# EAGLE board 00A-004-A (EAGLE 6.3)
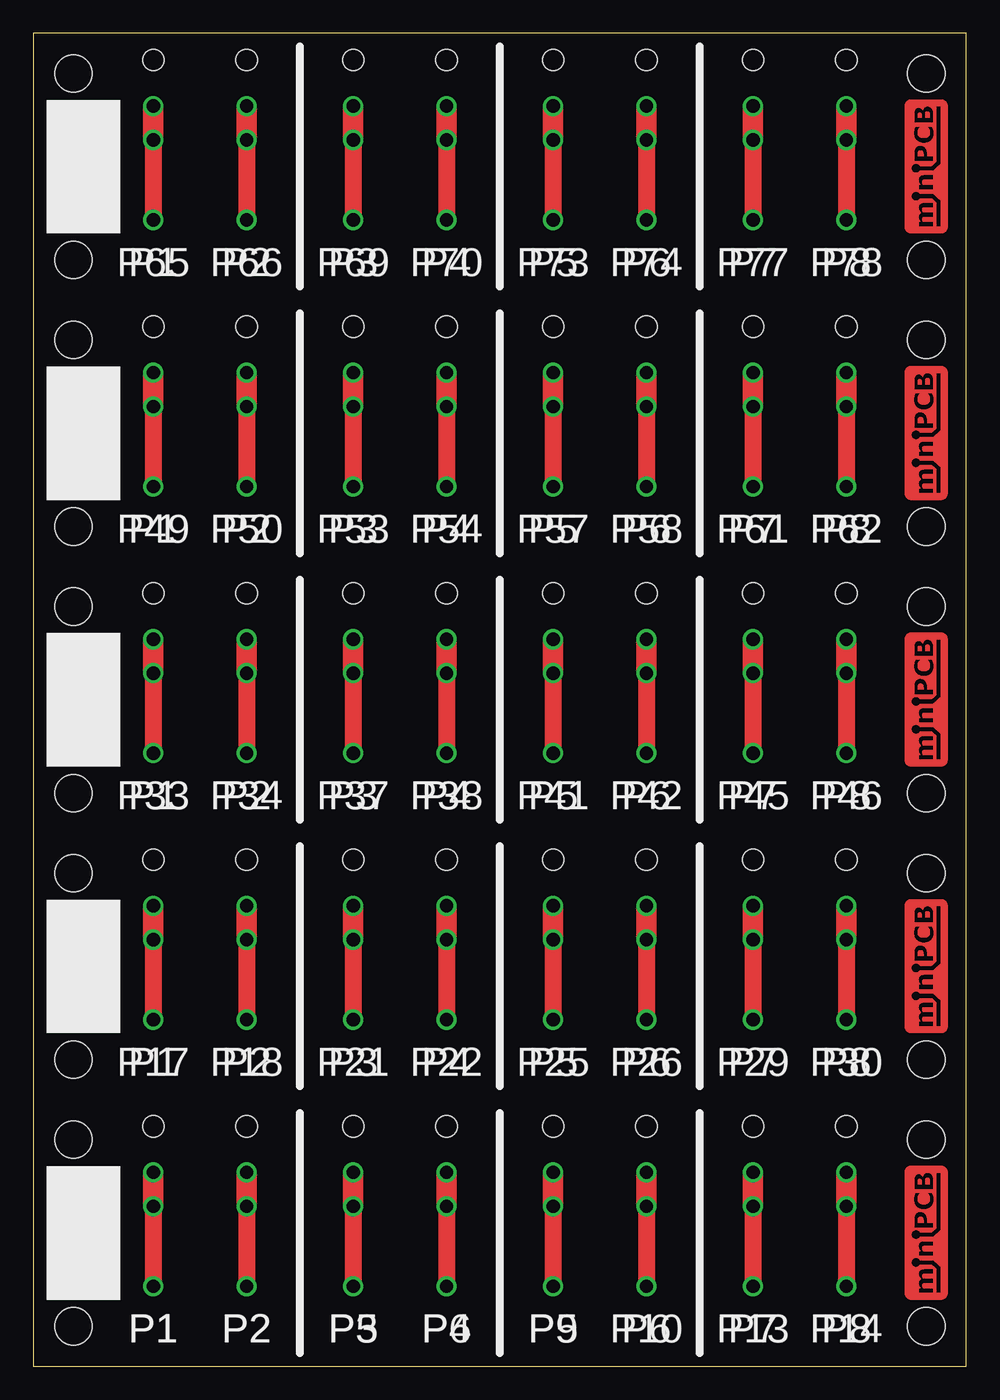
[diagram p0: board, top side]
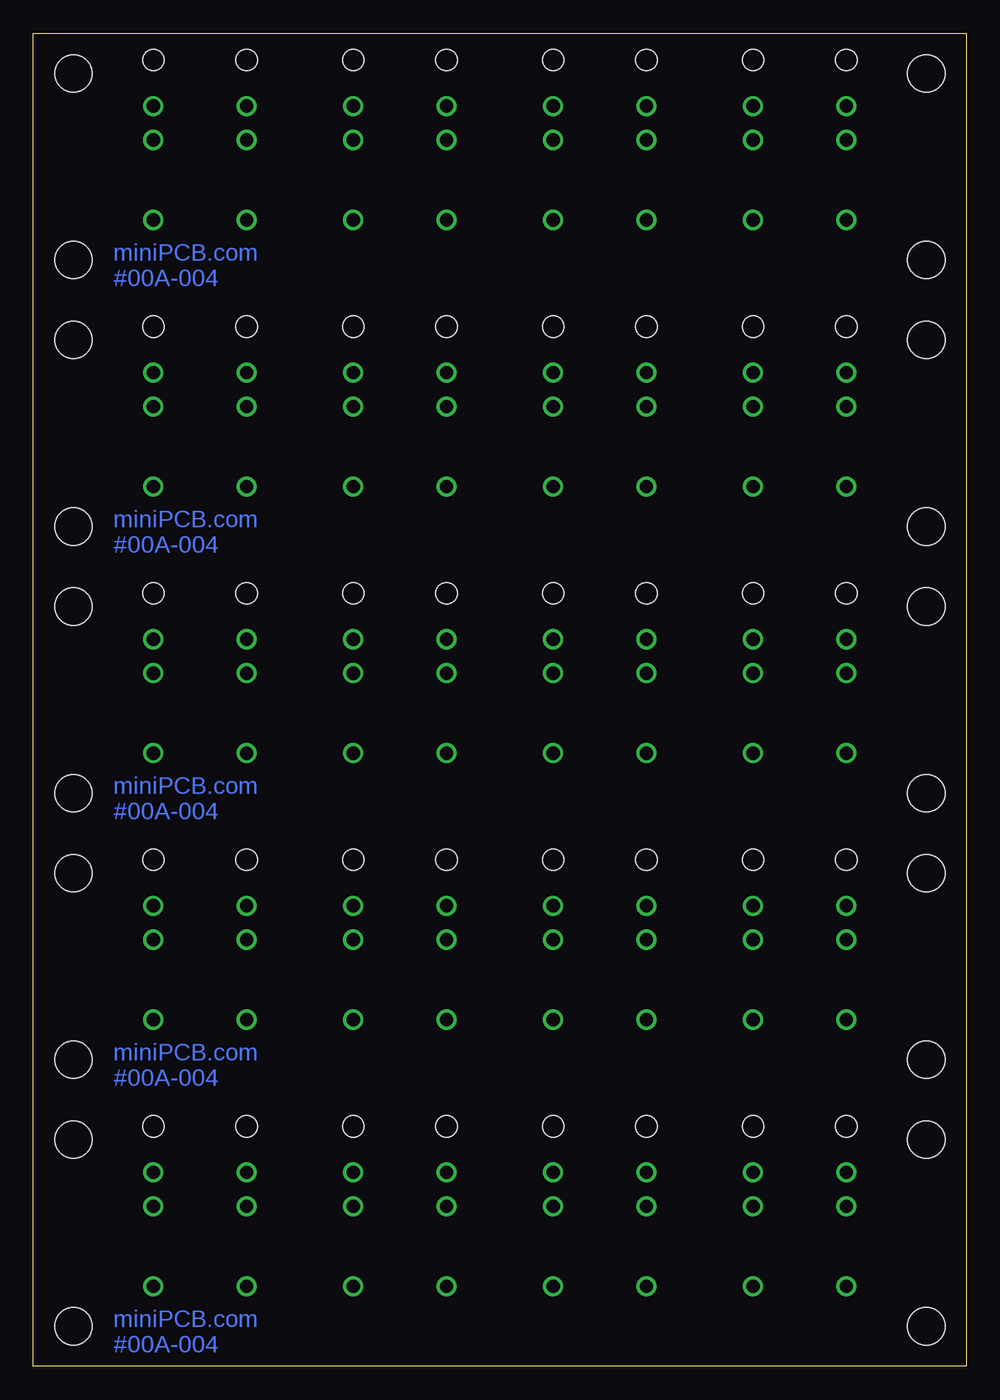
[diagram p1: board, bottom side, seen from below]

Size 70 x 100 mm. Coordinates in mm from the lower left corner, seen from the top.
Outline: 0,0 70,0 70,100 0,100 0,0
Copper layers (1*16): Top 0.035mm / dielectric 1.5mm / Bottom 0.035mm
Design rules "default": minimum track width 10mil, minimum drill 24mil, track to track 8mil, track to pad 8mil, pad to pad 8mil, via to via 8mil, smd to smd 8mil, copper to edge 40mil, drill to drill 8mil, minimum pad ring 10mil, minimum via ring 8mil, stop-mask expansion 4mil, vias tented up to drill 0mil, thermal gap 10mil
Holes 1.6 mm at 9,18 16,18 24,18 31,18 39,18 46,18 54,18 61,18 9,38 16,38 24,38 31,38 39,38 46,38 54,38 61,38 9,58 16,58 24,58 31,58 39,58 46,58 54,58 61,58 9,78 16,78 24,78 31,78 39,78 46,78 54,78 61,78 9,98 16,98 24,98 31,98 39,98 46,98 54,98 61,98
Holes 2.8 mm at 3,17 3,3 67,3 67,17 3,37 3,23 67,23 67,37 3,57 3,43 67,43 67,57 3,77 3,63 67,63 67,77 3,97 3,83 67,83 67,97

## Footprints (pad centres in the part's own frame; a part is rotated, then mirrored left to right if it is on the bottom)
PINS_1_TESTPOINT_KE5000 = drill 1: 1 0,0
PINS_1_1MM = drill 1: 1 0,0; 2 2.54,0

## Placement (x,y rotation side)
E$1  [MINIPCB-LOGO]  67,10 90 top
E$2  [MINIPCB-LOGO]  67,30 90 top
E$3  [MINIPCB-LOGO]  67,50 90 top
E$4  [MINIPCB-LOGO]  67,70 90 top
E$5  [MINIPCB-LOGO]  67,90 90 top
P1  [PINS_1_TESTPOINT_KE5000]  9,6 180 top
P2  [PINS_1_TESTPOINT_KE5000]  16,6 180 top
P3  [PINS_1_1MM]  9,12 90 top
P4  [PINS_1_1MM]  16,12 90 top
P5  [PINS_1_TESTPOINT_KE5000]  24,6 180 top
P6  [PINS_1_TESTPOINT_KE5000]  31,6 180 top
P7  [PINS_1_1MM]  24,12 90 top
P8  [PINS_1_1MM]  31,12 90 top
P9  [PINS_1_TESTPOINT_KE5000]  39,6 180 top
P10  [PINS_1_TESTPOINT_KE5000]  46,6 180 top
P11  [PINS_1_1MM]  39,12 90 top
P12  [PINS_1_1MM]  46,12 90 top
P13  [PINS_1_TESTPOINT_KE5000]  54,6 180 top
P14  [PINS_1_TESTPOINT_KE5000]  61,6 180 top
P15  [PINS_1_1MM]  54,12 90 top
P16  [PINS_1_1MM]  61,12 90 top
P17  [PINS_1_TESTPOINT_KE5000]  9,26 180 top
P18  [PINS_1_TESTPOINT_KE5000]  16,26 180 top
P19  [PINS_1_1MM]  9,32 90 top
P20  [PINS_1_1MM]  16,32 90 top
P21  [PINS_1_TESTPOINT_KE5000]  24,26 180 top
P22  [PINS_1_TESTPOINT_KE5000]  31,26 180 top
P23  [PINS_1_1MM]  24,32 90 top
P24  [PINS_1_1MM]  31,32 90 top
P25  [PINS_1_TESTPOINT_KE5000]  39,26 180 top
P26  [PINS_1_TESTPOINT_KE5000]  46,26 180 top
P27  [PINS_1_1MM]  39,32 90 top
P28  [PINS_1_1MM]  46,32 90 top
P29  [PINS_1_TESTPOINT_KE5000]  54,26 180 top
P30  [PINS_1_TESTPOINT_KE5000]  61,26 180 top
P31  [PINS_1_1MM]  54,32 90 top
P32  [PINS_1_1MM]  61,32 90 top
P33  [PINS_1_TESTPOINT_KE5000]  9,46 180 top
P34  [PINS_1_TESTPOINT_KE5000]  16,46 180 top
P35  [PINS_1_1MM]  9,52 90 top
P36  [PINS_1_1MM]  16,52 90 top
P37  [PINS_1_TESTPOINT_KE5000]  24,46 180 top
P38  [PINS_1_TESTPOINT_KE5000]  31,46 180 top
P39  [PINS_1_1MM]  24,52 90 top
P40  [PINS_1_1MM]  31,52 90 top
P41  [PINS_1_TESTPOINT_KE5000]  39,46 180 top
P42  [PINS_1_TESTPOINT_KE5000]  46,46 180 top
P43  [PINS_1_1MM]  39,52 90 top
P44  [PINS_1_1MM]  46,52 90 top
P45  [PINS_1_TESTPOINT_KE5000]  54,46 180 top
P46  [PINS_1_TESTPOINT_KE5000]  61,46 180 top
P47  [PINS_1_1MM]  54,52 90 top
P48  [PINS_1_1MM]  61,52 90 top
P49  [PINS_1_TESTPOINT_KE5000]  9,66 180 top
P50  [PINS_1_TESTPOINT_KE5000]  16,66 180 top
P51  [PINS_1_1MM]  9,72 90 top
P52  [PINS_1_1MM]  16,72 90 top
P53  [PINS_1_TESTPOINT_KE5000]  24,66 180 top
P54  [PINS_1_TESTPOINT_KE5000]  31,66 180 top
P55  [PINS_1_1MM]  24,72 90 top
P56  [PINS_1_1MM]  31,72 90 top
P57  [PINS_1_TESTPOINT_KE5000]  39,66 180 top
P58  [PINS_1_TESTPOINT_KE5000]  46,66 180 top
P59  [PINS_1_1MM]  39,72 90 top
P60  [PINS_1_1MM]  46,72 90 top
P61  [PINS_1_TESTPOINT_KE5000]  54,66 180 top
P62  [PINS_1_TESTPOINT_KE5000]  61,66 180 top
P63  [PINS_1_1MM]  54,72 90 top
P64  [PINS_1_1MM]  61,72 90 top
P65  [PINS_1_TESTPOINT_KE5000]  9,86 180 top
P66  [PINS_1_TESTPOINT_KE5000]  16,86 180 top
P67  [PINS_1_1MM]  9,92 90 top
P68  [PINS_1_1MM]  16,92 90 top
P69  [PINS_1_TESTPOINT_KE5000]  24,86 180 top
P70  [PINS_1_TESTPOINT_KE5000]  31,86 180 top
P71  [PINS_1_1MM]  24,92 90 top
P72  [PINS_1_1MM]  31,92 90 top
P73  [PINS_1_TESTPOINT_KE5000]  39,86 180 top
P74  [PINS_1_TESTPOINT_KE5000]  46,86 180 top
P75  [PINS_1_1MM]  39,92 90 top
P76  [PINS_1_1MM]  46,92 90 top
P77  [PINS_1_TESTPOINT_KE5000]  54,86 180 top
P78  [PINS_1_TESTPOINT_KE5000]  61,86 180 top
P79  [PINS_1_1MM]  54,92 90 top
P80  [PINS_1_1MM]  61,92 90 top

## Library data of the parts
E$1-E$5 P1-P80 = nolan-utsa

## Nets
N$1: P1.1 P3.1 P3.2
N$2: P2.1 P4.1 P4.2
N$3: P5.1 P7.1 P7.2
N$4: P6.1 P8.1 P8.2
N$5: P9.1 P11.1 P11.2
N$6: P10.1 P12.1 P12.2
N$7: P13.1 P15.1 P15.2
N$8: P14.1 P16.1 P16.2
N$9: P17.1 P19.1 P19.2
N$10: P18.1 P20.1 P20.2
N$11: P21.1 P23.1 P23.2
N$12: P22.1 P24.1 P24.2
N$13: P25.1 P27.1 P27.2
N$14: P26.1 P28.1 P28.2
N$15: P29.1 P31.1 P31.2
N$16: P30.1 P32.1 P32.2
N$17: P33.1 P35.1 P35.2
N$18: P34.1 P36.1 P36.2
N$19: P37.1 P39.1 P39.2
N$20: P38.1 P40.1 P40.2
N$21: P41.1 P43.1 P43.2
N$22: P42.1 P44.1 P44.2
N$23: P45.1 P47.1 P47.2
N$24: P46.1 P48.1 P48.2
N$25: P49.1 P51.1 P51.2
N$26: P50.1 P52.1 P52.2
N$27: P53.1 P55.1 P55.2
N$28: P54.1 P56.1 P56.2
N$29: P57.1 P59.1 P59.2
N$30: P58.1 P60.1 P60.2
N$31: P61.1 P63.1 P63.2
N$32: P62.1 P64.1 P64.2
N$33: P65.1 P67.1 P67.2
N$34: P66.1 P68.1 P68.2
N$35: P69.1 P71.1 P71.2
N$36: P70.1 P72.1 P72.2
N$37: P73.1 P75.1 P75.2
N$38: P74.1 P76.1 P76.2
N$39: P77.1 P79.1 P79.2
N$40: P78.1 P80.1 P80.2

## Tracks (layer width: path | path; a pad name or v marks a point on that pad's centre or on a via)
N$1
  Top 1.27: P3.2 P3.1 P1.1
N$2
  Top 1.27: P4.2 P4.1 P2.1
N$3
  Top 1.27: P7.2 P7.1 P5.1
N$4
  Top 1.27: P8.2 P8.1 P6.1
N$5
  Top 1.27: P11.2 P11.1 P9.1
N$6
  Top 1.27: P12.2 P12.1 P10.1
N$7
  Top 1.27: P15.2 P15.1 P13.1
N$8
  Top 1.27: P16.2 P16.1 P14.1
N$9
  Top 1.27: P19.2 P19.1 P17.1
N$10
  Top 1.27: P20.2 P20.1 P18.1
N$11
  Top 1.27: P23.2 P23.1 P21.1
N$12
  Top 1.27: P24.2 P24.1 P22.1
N$13
  Top 1.27: P27.2 P27.1 P25.1
N$14
  Top 1.27: P28.2 P28.1 P26.1
N$15
  Top 1.27: P31.2 P31.1 P29.1
N$16
  Top 1.27: P32.2 P32.1 P30.1
N$17
  Top 1.27: P35.2 P35.1 P33.1
N$18
  Top 1.27: P36.2 P36.1 P34.1
N$19
  Top 1.27: P39.2 P39.1 P37.1
N$20
  Top 1.27: P40.2 P40.1 P38.1
N$21
  Top 1.27: P43.2 P43.1 P41.1
N$22
  Top 1.27: P44.2 P44.1 P42.1
N$23
  Top 1.27: P47.2 P47.1 P45.1
N$24
  Top 1.27: P48.2 P48.1 P46.1
N$25
  Top 1.27: P51.2 P51.1 P49.1
N$26
  Top 1.27: P52.2 P52.1 P50.1
N$27
  Top 1.27: P55.2 P55.1 P53.1
N$28
  Top 1.27: P56.2 P56.1 P54.1
N$29
  Top 1.27: P59.2 P59.1 P57.1
N$30
  Top 1.27: P60.2 P60.1 P58.1
N$31
  Top 1.27: P63.2 P63.1 P61.1
N$32
  Top 1.27: P64.2 P64.1 P62.1
N$33
  Top 1.27: P67.2 P67.1 P65.1
N$34
  Top 1.27: P68.2 P68.1 P66.1
N$35
  Top 1.27: P71.2 P71.1 P69.1
N$36
  Top 1.27: P72.2 P72.1 P70.1
N$37
  Top 1.27: P75.2 P75.1 P73.1
N$38
  Top 1.27: P76.2 P76.1 P74.1
N$39
  Top 1.27: P79.2 P79.1 P77.1
N$40
  Top 1.27: P80.2 P80.1 P78.1

## Text on the board
Bottom: miniPCB.com / #00A-004 | miniPCB.com / #00A-004 | miniPCB.com / #00A-004 | miniPCB.com / #00A-004 | miniPCB.com / #00A-004
_tPlace: P1 | P2 | P3 | P4 | P5 | P6 | P7 | P8 | P1 | P2 | P3 | P4 | P5 | P6 | P7 | P8 | P1 | P2 | P3 | P4 | P5 | P6 | P7 | P8 | P1 | P2 | P3 | P4 | P5 | P6 | P7 | P8 | P1 | P2 | P3 | P4 | P5 | P6 | P7 | P8